# Altium PCB nrf51422_qfaa.PcbDoc
Units mil, origin at the board's own origin, x right, y up, seen from the top; angles counter-clockwise.
Board outline 563 x 621.81 mil, 2 copper layers (Top Layer, Bottom Layer), stack 65.8 mil thick; 17 components, 44 nets, 84 pads, 45 vias.
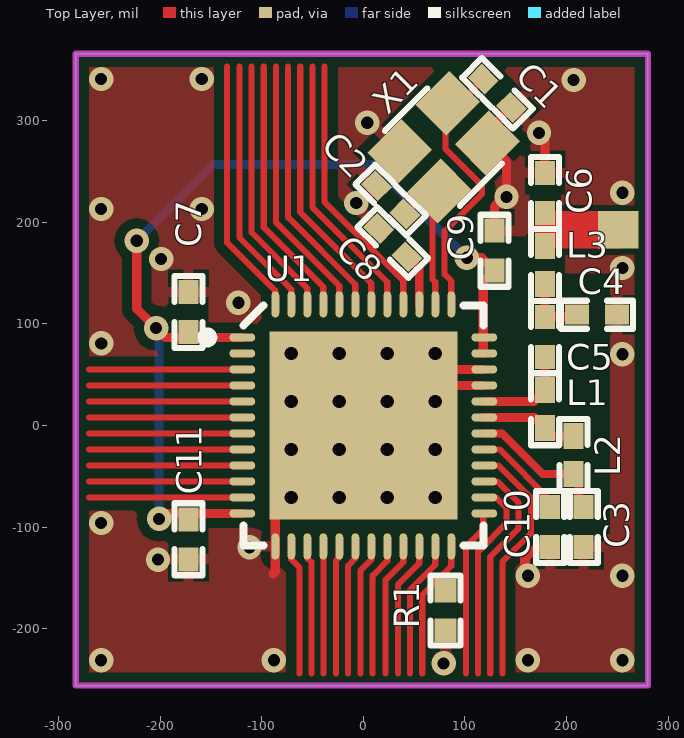
[diagram p0: Top Layer view]
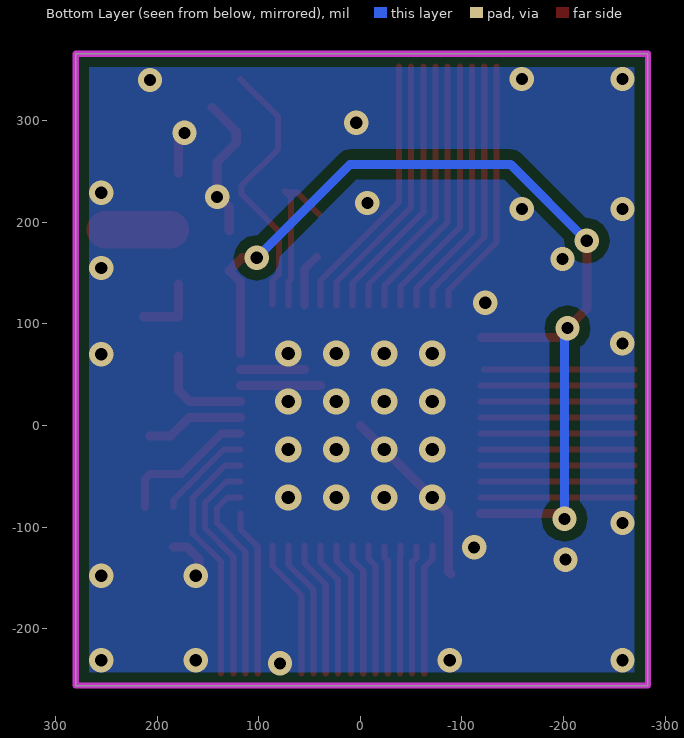
[diagram p1: Bottom Layer view, seen from below]
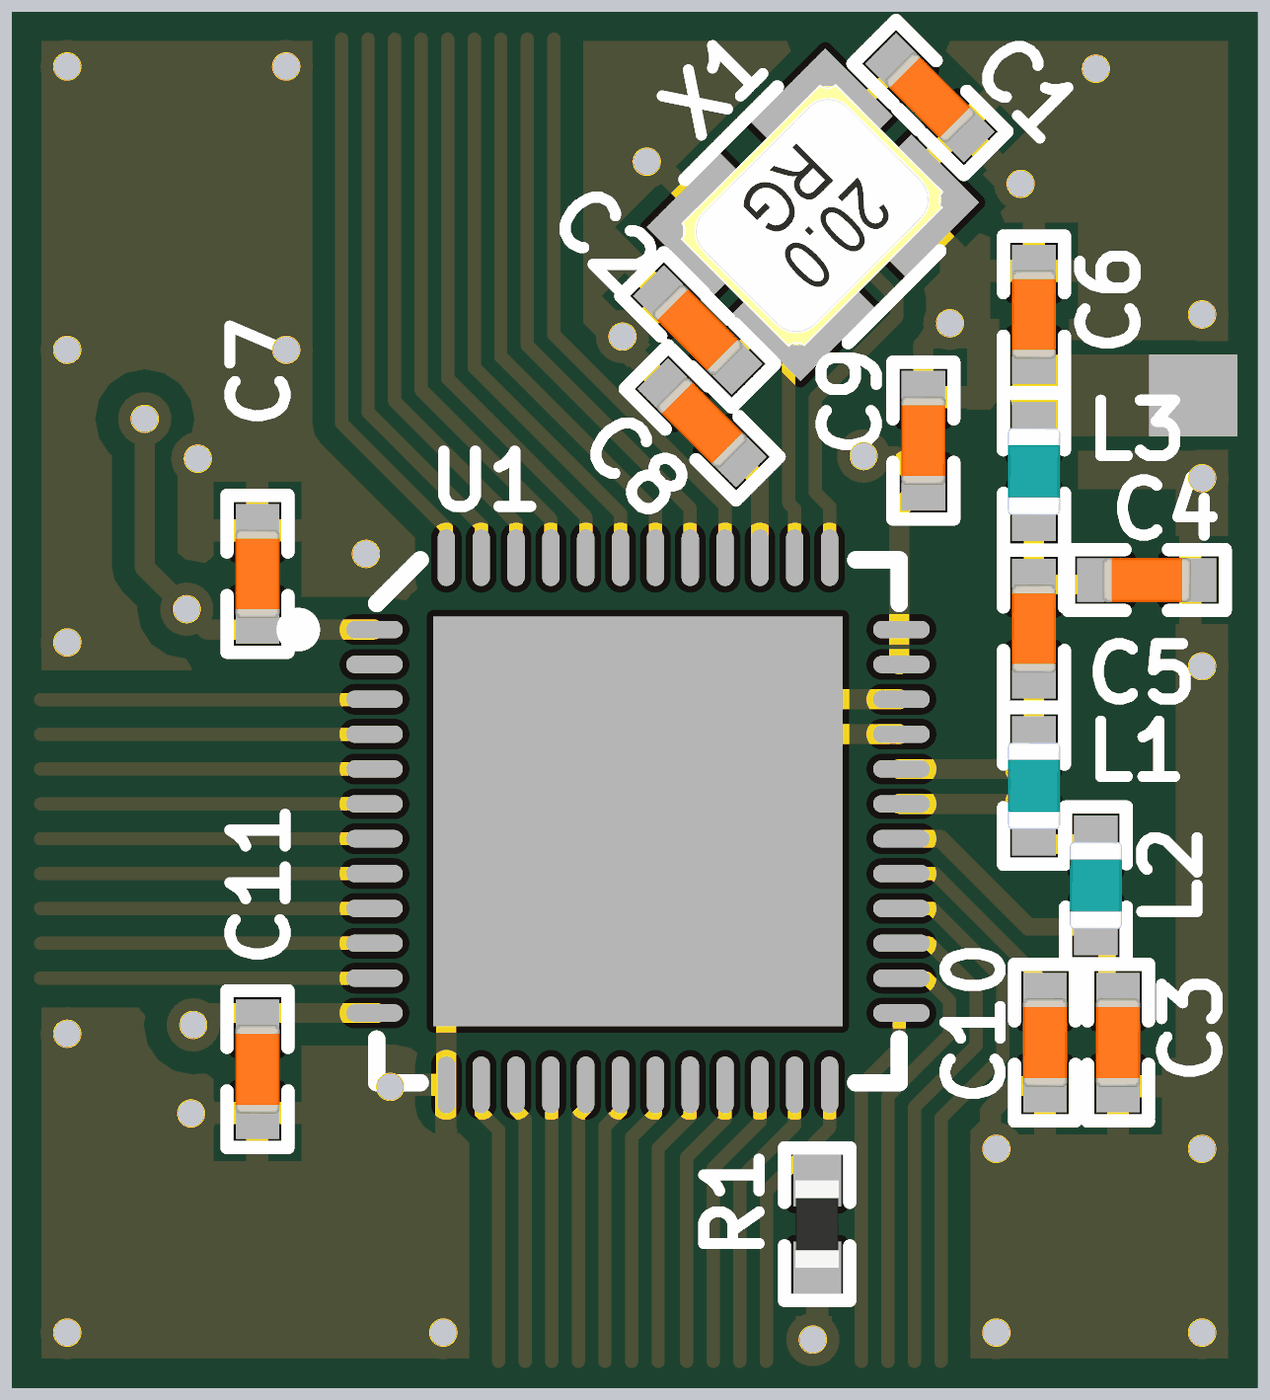
[diagram p2: 3D render of the assembled board from above, using the file's embedded part models]

## Layer stack, top to bottom
Top Layer: signal copper 1.4
Dielectric: core 63, FR-4, Dk 4.8
Bottom Layer: signal copper 1.4

## Board outline
-282.95,-256 280.05,-256 280.05,365.81 -282.95,365.81

## Design rules (kind name [scope] priority, off if disabled: settings)
Clearance Polygon_ANT [(InNamedPolygon('Top_Layer-GND')) or (InNamedPolygon('Bottom_Layer-GND')) vs InNet('NetC6_1')] p1: gap=6
Clearance Polygon [(InNamedPolygon('Top_Layer-GND')) or (InNamedPolygon('Bottom_Layer-GND'))] p2: gap=10
Clearance [All] p3: gap=6
ComponentClearance [All] p1 off: gap=10 collisioncheckmode=3 verticalgap=10 showdistances=FALSE
FabricationTestPointUsage TestPointUsage [All] p1: valid=0 allowmultiple=FALSE
FabricationTestpoint Testpoint [All] p1: side=3 testpointundercomponent=TRUE minsize=40 maxsize=100 preferedsize=60 minholesize=0 maxholesize=40 preferedholesize=32 testpointgrid=1 allowsidetop=TRUE allowsidebottom=TRUE usegrid=TRUE gridtolerance=0.01
Height [All] p1 off: minheight=0 maxheight=1000 prefheight=500
HoleSize [All] p1: absolutevalues=TRUE maxlimit=160 minlimit=12 maxpercent=80.000 minpercent=20.000
MinimumAnnularRing [All] p1 off: minimumring=6
PolygonConnect PolygonConnect_1 [isVia and innet(gnd)] p1: connectstyle=Direct reliefconductorwidth=10 reliefentries=4 polygonreliefangle="90 Angle"
PolygonConnect [All] p2: connectstyle=Relief reliefconductorwidth=10 reliefentries=4 polygonreliefangle="90 Angle"
RoutingVias [All] p1: holewidth=16 width=32 viastyle="Through Hole" minholewidth=10 minwidth=10 maxholewidth=28 maxwidth=50
SilkscreenOverComponentPads [All] p1: minsilkscreentomaskgap=10
SolderMaskExpansion [All] p1: expansion=3
Width [All] p1: maxlimit=100 minlimit=6 preferedwidth=6
22 further rules are at their usual default settings.

## Components (designator, comment, footprint, x,y, rotation, side; value= is the part's Value field where it differs from the comment)
C1 "12pF" CAPC1005X04L 132,327 r315 top (schematic designator C7)
C2 "12pF" CAPC1005X04L 27,222 r135 top
C3 "2.2nF" CAPC1005X04L 217,-100 r270 top
C4 "1.0pF" CAPC1005X04L 230,109 r0 top
C5 "2.2pF" CAPC1005X04L 179,87 r90 top
C6 "1.5pF" CAPC1005X04L 179,229 r90 top
C7 "100nF" CAPC1005X04L -172,111.81 r90 top (schematic designator C9)
C8 "100nF" CAPC1005X04L 29,180 r135 top (schematic designator C10)
C9 "1.0nF" CAPC1005X04L 129,172 r90 top (schematic designator C8)
C10 "47nF" CAPC1005X04L 184,-100 r270 top (schematic designator C11)
C11 "100nF" CAPC1005X04L -172,-112 r270 top (schematic designator C12)
L1 "4.7nH" INDC1005X04L 179,16 r90 top
L2 "10nH" INDC1005X04L 207,-29 r90 top
L3 "3.3nH" INDC1005X04L 179,158 r90 top
R1 "12k" RESC1005X04L 81,-182 r90 top
U1 "nRF51422-QFAA" QFN40P600X600X90-48N 0,0 r0 top
X1 "16MHz" BT-XTAL_2520 79,274 r225 top

## Footprints (in the part's own frame and the unit in brackets; to place one, negate y for a bottom-side part, rotate by r counter-clockwise, add the part's x,y. Pads: shape width x height; smd on the part's side, far side on the other; paste and mask are expansions set on the pad)
BT-XTAL_2520 [mm] "TSX-2520"
  rect 1.2x1.1 smd: 1(-0.85,-0.7) 2(0.85,-0.7) 3(0.85,0.7) 4(-0.85,0.7)
  silkscreen extent -1.55,-1.33 1.53,1.32, body extent -1.25,-1 1.27,1, height 0.56
CAPC1005X04L [mm] "Chip Capacitor, 2-Leads, Body 1.0x0.5mm, IPC High Density"
  rect 0.6x0.5 smd: 1(-0.5,0) 2(0.5,0)
  silkscreen extent -0.9,-0.35 0.9,0.35, body extent -0.51,-0.25 0.51,0.25, height 0.5
INDC1005X04L [mm] "Chip Inductor, 2-Leads, Body 1.0x0.5mm, IPC High Density"
  rect 0.65x0.5 smd: 1(-0.475,0) 2(0.475,0)
  silkscreen extent -0.9,-0.35 0.9,0.35, body extent -0.5,-0.3 0.5,0.3, height 0.5
QFN40P600X600X90-48N [mm] "QFN, 48-Leads, Body 6,0x6,0mm (max), Pitch 0,40mm, IPC Medium Density"
  oval 0.65x0.2 smd: 1(-3.025,2.2) 2(-3.025,1.8) 3(-3.025,1.4) 4(-3.025,1) 5(-3.025,0.6) 6(-3.025,0.2) 7(-3.025,-0.2) 8(-3.025,-0.6) 9(-3.025,-1) 10(-3.025,-1.4) 11(-3.025,-1.8) 12(-3.025,-2.2) 25(3.025,-2.2) 26(3.025,-1.8) 27(3.025,-1.4) 28(3.025,-1) 29(3.025,-0.6) 30(3.025,-0.2) 31(3.025,0.2) 32(3.025,0.6) 33(3.025,1) 34(3.025,1.4) 35(3.025,1.8) 36(3.025,2.2)
  oval 0.2x0.65 smd: 13(-2.2,-3.025) 14(-1.8,-3.025) 15(-1.4,-3.025) 16(-1,-3.025) 17(-0.6,-3.025) 18(-0.2,-3.025) 19(0.2,-3.025) 20(0.6,-3.025) 21(1,-3.025) 22(1.4,-3.025) 23(1.8,-3.025) 24(2.2,-3.025) 37(2.2,3.025) 38(1.8,3.025) 39(1.4,3.025) 40(1,3.025) 41(0.6,3.025) 42(0.2,3.025) 43(-0.2,3.025) 44(-0.6,3.025) 45(-1,3.025) 46(-1.4,3.025) 47(-1.8,3.025) 48(-2.2,3.025)
  rect 4.7x4.7 smd: 49(0,0)
  silkscreen extent -4.02,-3 3,3, body extent -3,-3 3,3, height 0.9
RESC1005X04L [mm] "Chip Resistor, 2-Leads, Body 1.0x0.5mm, IPC High Density"
  rect 0.6x0.55 smd: 1(-0.5,0) 2(0.5,0)
  silkscreen extent -0.87,-0.38 0.88,0.38, body extent -0.5,-0.25 0.5,0.25, height 0.3

## Part data
C1 C2: library part C0402-12p, "Capacitor, NP0, ±2%"
C3: library part C0402-2n2, "Capacitor, X7R, ±10%"
C4: library part C0402-1.0p, "Capacitor, NP0, ±0.1pF"
C5: library part C0402-2.2p, "Capacitor, NP0, ±0.1pF"
C6: library part C0402-1.5p, "Capacitor, NP0, ±0.1pF"
C7 C8 C11: library part C0402-100n, "Capacitor, X7R, ±10%"
C9: library part C0402-1n0, "Capacitor, X7R, ±10%"
C10: library part C0402-47n, "Capacitor, X7R, ±10%"
L1: library part L0402-4n7, "Inductor, 160mA, ±0.1nH"
L2: library part L0402-10n, "Inductor, 100mA, ±2%"
L3: library part L0402-3n3, "Inductor, 190mA, ±0.1nH"
R1: library part R0402-12k, "Resistor, ±1%, 0.063W"
U1: library part nRF51422-Q48-6x6_DCDC, "Multi-protocol ANT System-on-Chip"
X1: library part NX2520SA-16MHZ-STD-CSW-5, "XTAL SMD 2520, 16MHz, 8pF, ±40ppm"

## Free pads (board coordinates)
  rect 40x37 smd: 0(251,192.43)

## Via types
v1: diameter 24, hole 12, Top Layer to Bottom Layer, tented both sides, 29 vias
v2: diameter 25.98, hole 12.99, Top Layer to Bottom Layer, tented both sides, 16 vias

## Nets (pads, with @x,y where several pads share a name; then routed paths per layer and width w, separated by ;. In a path a pad name is that pad's centre, name@x,y a point inside that pad or via, vN(x,y) a via of type N, cw(c..) or ccw(c..) an arc to the next point about the centre after c; other vN are vias at no path point)
GND: C1.2 C2.2 C3.2 C4.2 C6.2 C7.2 C8.2 C9.2 C10.2 C11.2 R1.1 U1.13 U1.33 U1.34 U1.49 X1.2 X1.4 | length 545.8
  Top Layer w9: -88.95,-146.19 -86.61,-143.85 U1.13 ; U1.13@-86.61,-118.11 -86.61,-86.61 U1.49 ; U1.49@39.37,39.37 U1.33@118.11,39.37 ; U1.49@55.12,55.12 U1.34@118.11,55.12 ; C9.2 129,215 139,225 v1(141,225) ; v1@142,225 v1(141,225) ; C1.2 122.15,289.31 X1.4 141,259.33 v1(141,225) ; v1@159,-142 159,-131.33 170.65,-119.68 C10.2 ; C6.2 v1@179,284
  other v1: 79.05,-234.19 -258,-231 -88,-231 162,-231 255,-231 162,-148 255,-148 -202,-132 -112,-120 -258,-96 255,70 -257.95,80.81 -122.95,120.81 255,155 -198.95,163.81 -258,213 -159,213 -7,219 255,229 173,288 4,298 207,340 -258,341 -159,341
  other v2: -70.87,-70.87 -23.62,-70.87 23.62,-70.87 70.87,-70.87 -70.87,-23.62 -23.62,-23.62 23.62,-23.62 70.87,-23.62 -70.87,23.62 -23.62,23.62 23.62,23.62 70.87,23.62 -70.87,70.87 -23.62,70.87 23.62,70.87 70.87,70.87
NetC1_1: C1.1 U1.37 X1.1 | length 270.1
  Top Layer w6: U1.37 86.61,142.36 80.12,148.85 80.12,191.12 117,228 117,236 81,272 81,303.84 C1.1
NetC2_1: C2.1 U1.38 X1.3 | length 157.4
  Top Layer w6: C2.1 61.84,229 70.87,229 X1.3@70.87,226.89 ; U1.38@70.87,118.11 U1.38 70.87,141.13 68.12,143.88 68.12,224.14 X1.3@70.87,226.89 ; X1.3 X1.3@70.87,226.89
NetC3_1: C3.1 L2.1 U1.30 | length 140.1
  Top Layer w8: U1.30@118.11,-7.87 136.8,-7.87 176.63,-47.7 L2.1 212,-52.7 C3.1@212,-80.31
NetC4_1: C4.1 C5.2 L3.1 | length 66.6
  Top Layer w9: C5.2 L3.1 ; C5.2@179.31,107 C4.1@213.31,107
NetC5_1: C5.1 L1.2 U1.32 | length 99.1
  Top Layer w9: U1.32@118.11,23.62 167.92,23.62 L1.2 C5.1@179,68.3
NetC6_1: C6.1 L3.2 pad.0 | length 64
  Top Layer w37: 187,192.43 pad.0
NetC8_1: C8.1 U1.39 | length 53
  Top Layer w8: C8.1 55.12,153.88 U1.39@55.12,118.11
NetC10_1: C10.1 U1.29 | length 93.4
  Top Layer w6: U1.29@118.11,-23.62 134.17,-23.62 184,-73.45 C10.1
NetL1_1: L1.1 L2.2 U1.31 | length 96.4
  Top Layer w9: U1.31@118.11,7.87 168.43,7.87 186.6,-10.3 L2.2
P0.00: U1.4 | length 151.9
  Top Layer w6: -270,39.37 U1.4@-118.11,39.37
P0.01: U1.5 | length 151.9
  Top Layer w6: -270,23.62 U1.5@-118.11,23.62
P0.02: U1.6 | length 151.9
  Top Layer w6: -270,7.87 U1.6@-118.11,7.87
P0.03: U1.7 | length 151.9
  Top Layer w6: -270,-7.87 U1.7@-118.11,-7.87
P0.04: U1.8 | length 151.9
  Top Layer w6: -270,-23.62 U1.8@-118.11,-23.62
P0.05: U1.9 | length 151.9
  Top Layer w6: -270,-39.37 U1.9@-118.11,-39.37
P0.06: U1.10 | length 151.9
  Top Layer w6: -270,-55.12 U1.10@-118.11,-55.12
P0.07: U1.11 | length 151.9
  Top Layer w6: -270,-70.87 U1.11@-118.11,-70.87
P0.08: U1.14 | length 129.2
  Top Layer w6: U1.14@-70.87,-118.11 U1.14 -70.87,-131.72 -62.95,-139.64 -62.95,-244
P0.09: U1.15 | length 126.6
  Top Layer w6: U1.15 -55.12,-130.5 -50.95,-134.67 -50.95,-244
P0.10: U1.16 | length 126.1
  Top Layer w6: U1.16@-39.37,-118.11 U1.16 -39.37,-127.77 -38.95,-128.19 -38.95,-244
P0.11: U1.17 | length 126.3
  Top Layer w6: -26.95,-244 -26.95,-132.94 -23.62,-129.6 U1.17
P0.12: U1.18 | length 128.8
  Top Layer w6: -14.95,-244 -14.95,-137.91 -7.87,-130.83 U1.18 U1.18@-7.87,-118.11
P0.13: U1.19 | length 130.3
  Top Layer w6: -2.87,-244 -2.87,-142.8 7.87,-132.06 U1.19 U1.19@7.87,-118.11
P0.14: U1.20 | length 131.9
  Top Layer w6: 9.13,-244 9.13,-147.8 23.62,-133.31 U1.20 U1.20@23.62,-118.11
P0.15: U1.21 | length 133.1
  Top Layer w6: 22.05,-244 22.05,-151.89 39.37,-134.56 U1.21 U1.21@39.37,-118.11
P0.16: U1.22 | length 134.6
  Top Layer w6: 34.05,-244 34.05,-156.89 55.12,-135.82 U1.22 U1.22@55.12,-118.11
P0.17: U1.25 | length 164.5
  Top Layer w6: 101,-244 101,-119.33 118.11,-102.22 U1.25@118.11,-86.61
P0.18: U1.26 | length 201.4
  Top Layer w6: 113,-244 113,-124.3 140.89,-96.41 140.89,-81.26 130.5,-70.87 U1.26@118.11,-70.87
P0.19: U1.27 | length 222.8
  Top Layer w6: U1.27@118.11,-55.12 131.72,-55.12 152.89,-76.29 152.89,-101.38 125,-129.27 125,-244
P0.20: U1.28 | length 244.2
  Top Layer w6: U1.28@118.11,-39.37 132.95,-39.37 164.89,-71.31 164.89,-106.35 137,-134.24 137,-244
P0.21: U1.40 | length 267.3
  Top Layer w6: -38,353.31 -38,219.79 39.37,142.42 U1.40@39.37,118.11
P0.22: U1.41 | length 265.7
  Top Layer w6: -50,353.31 -50,214.82 23.62,141.2 U1.41@23.62,118.11
P0.23: U1.42 | length 264.1
  Top Layer w6: -62,353.31 -62,209.85 7.87,139.98 U1.42@7.87,118.11
P0.24: U1.43 | length 262.6
  Top Layer w6: -74,353.31 -74,204.88 -7.87,138.76 U1.43@-7.87,118.11
P0.25: U1.44 | length 261
  Top Layer w6: -86,353.31 -86,199.91 -23.62,137.53 U1.44@-23.62,118.11
P0.26: U1.45 | length 259.5
  Top Layer w6: -98,353.31 -98,194.94 -39.37,136.31 U1.45@-39.37,118.11
P0.27: U1.46 | length 257.9
  Top Layer w6: -110,353.31 -110,189.97 -55.12,135.09 U1.46@-55.12,118.11
P0.28: U1.47 | length 256.4
  Top Layer w6: -122,353.31 -122,185 -70.87,133.87 U1.47@-70.87,118.11
P0.29: U1.48 | length 254.8
  Top Layer w6: -134,353.31 -134,180.03 -86.61,132.64 U1.48@-86.61,118.11
P0.30: U1.3 | length 148
  Top Layer w6: -270,55 U1.3@-122,55
SWCLK: R1.2 U1.24 | length 137.7
  Top Layer w6: 58.05,-244 58.05,-166.89 86.61,-138.32 U1.24 U1.24@86.61,-118.11
SWDIO: U1.23 | length 136.2
  Top Layer w6: 46.05,-244 46.05,-161.89 70.87,-137.07 U1.23 U1.23@70.87,-118.11
VCC_NRF: C7.1 C9.1 C11.1 U1.1 U1.12 U1.35 U1.36 | length 963.3
  Top Layer w9: v1(-222.95,181.81) -222.95,114.81 v1(-203.95,95.81) -194.75,86.61 U1.1 ; v1@-199.61,-86.61 U1.12@-118.11,-86.61 ; v1(102,165) 116.31,165 C9.1 118.11,141.43 U1.35@118.11,70.87
  Bottom Layer w9: v1(-222.95,181.81) -147.77,257 10,257 v1(102,165) ; v1@-201,-91 v1@-201,95.81
  other v1: -201,-92
pads on no net: U1.2

## Polygon pours and split planes (outlines as drawn)
GND on Bottom Layer "Bottom_Layer-GND" (solid, remove dead copper, pour order 1001): -321,400 -321,-274.19 293,-274.19 293,400 -321,400
GND on Top Layer "Top_Layer-GND" (solid, remove dead copper, pour order 1000): -319,410 -319,-272.19 310,-272.19 310,410 -319,410

## Keep-outs
Keep-Out Layer:
  the board outline again, w6

## Other copper
Top Layer:
  pour cut-out: 98.02,-100 -98,-100 -98,98 97.97,98
  pour cut-out: 53.58,181.42 26.97,154.82 5.05,176.74 31.66,203.34
  pour cut-out: 199,123 125,123 125,186 199,186
  pour cut-out: 243,-107 141,-107 141,150 243,150

## Silkscreen, mask and mechanical layers (free items; w line width, h text height)
Mechanical 1:
  the board outline again, w6

## Dimensions
280.05,365.81 to 280.05,-256 on Mechanical 3
-282.95,-256 to 280.05,-256 on Mechanical 3